# Altium PCB UP24CI01v5.PcbDoc
Units mm, origin at the board's own origin, x right, y up, seen from the top; angles counter-clockwise.
Board outline 40 x 29.97 mm, 2 copper layers (Top Layer, Bottom Layer), stack 1.569 mm thick; 37 components, 26 nets, 114 pads, 27 vias.
Unrouted connection lines stored in the file: 2.
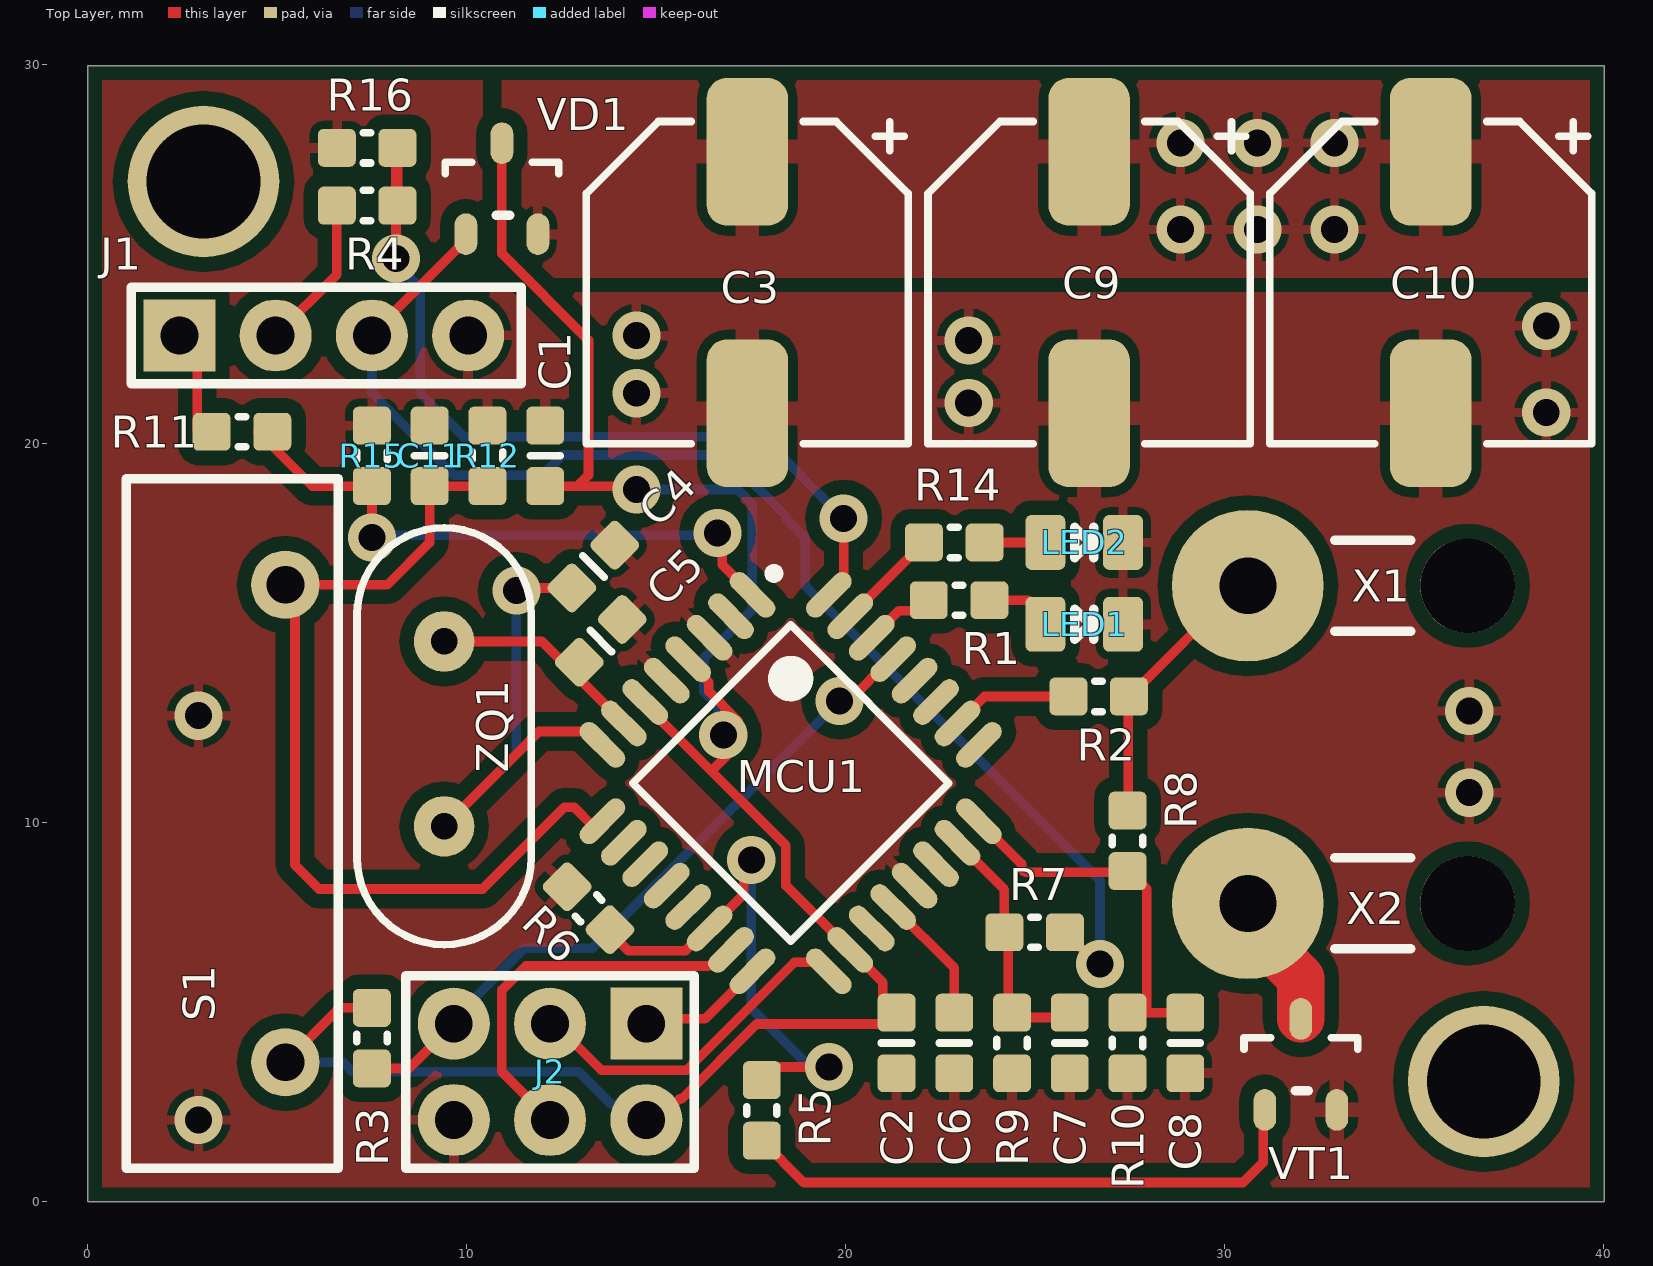
[diagram p0: Top Layer view]
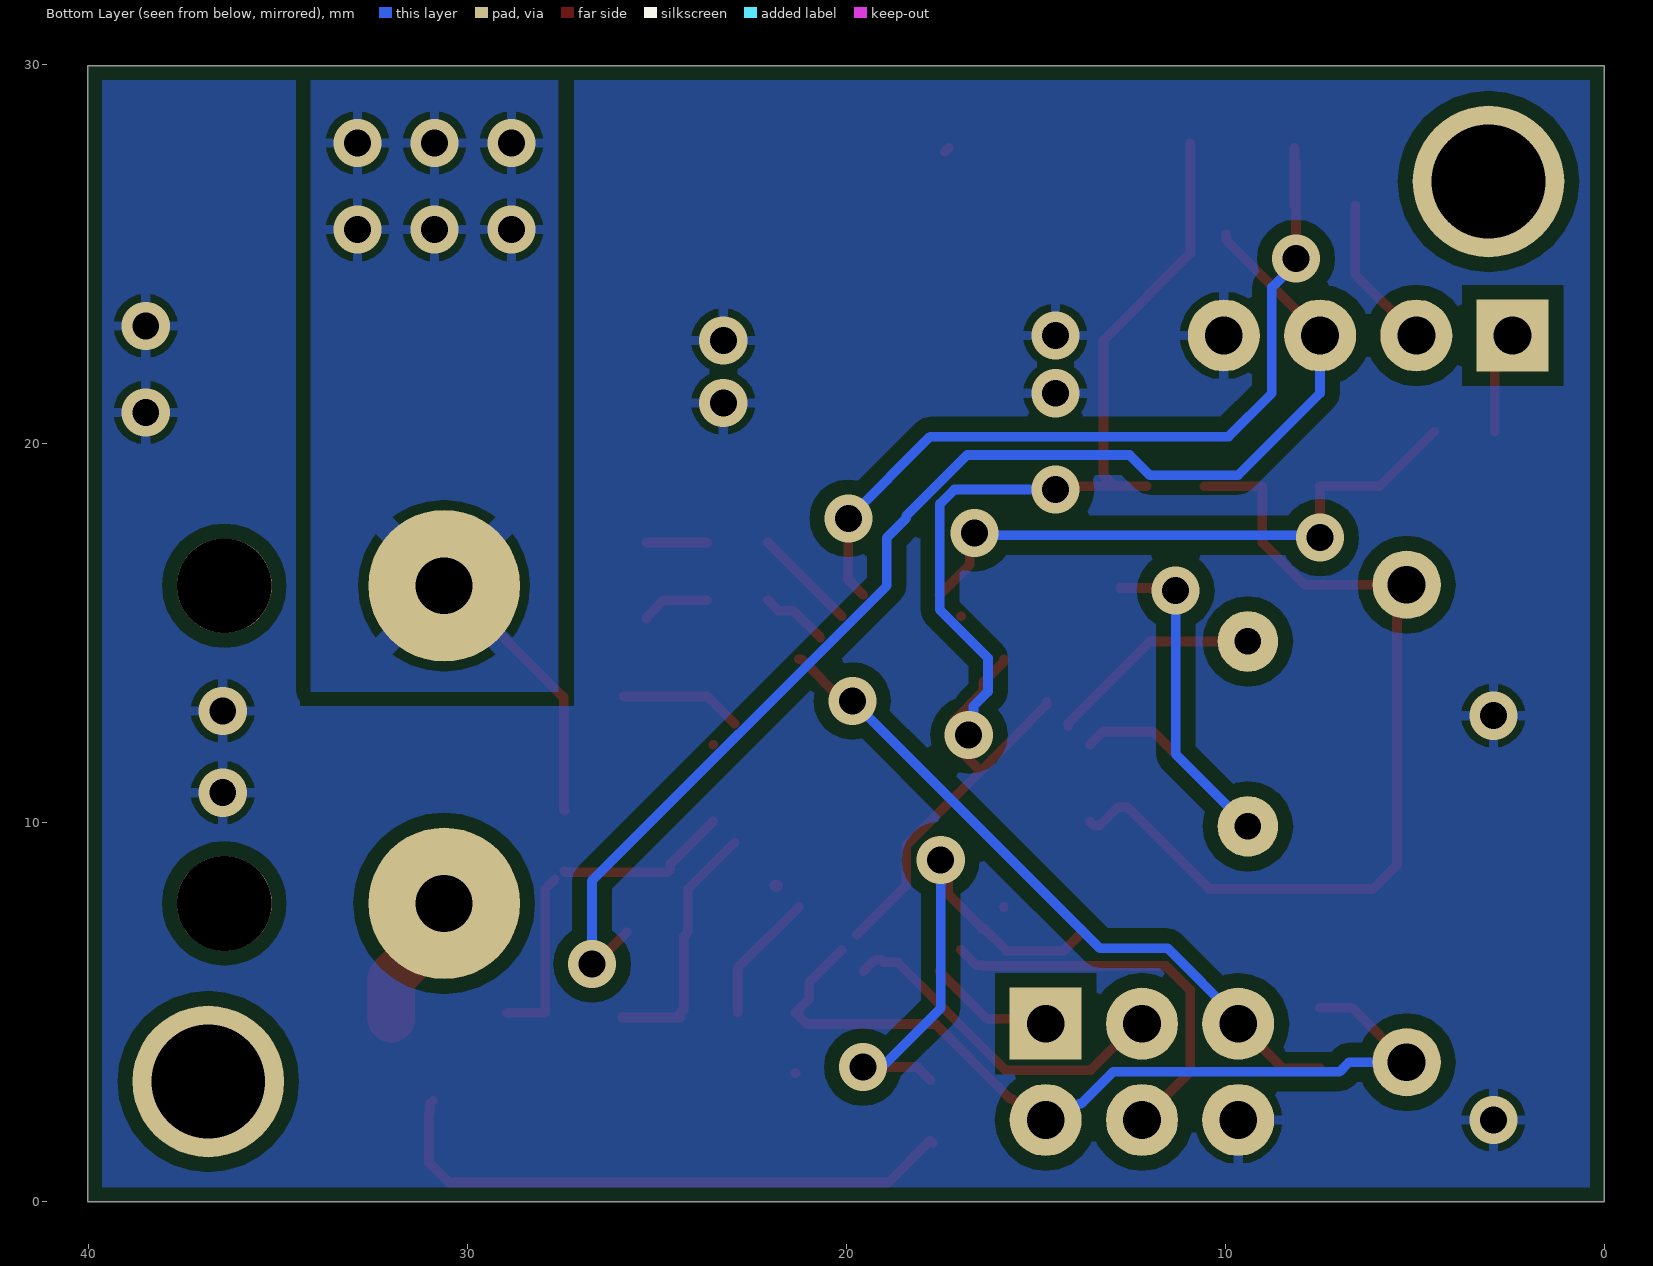
[diagram p1: Bottom Layer view, seen from below]
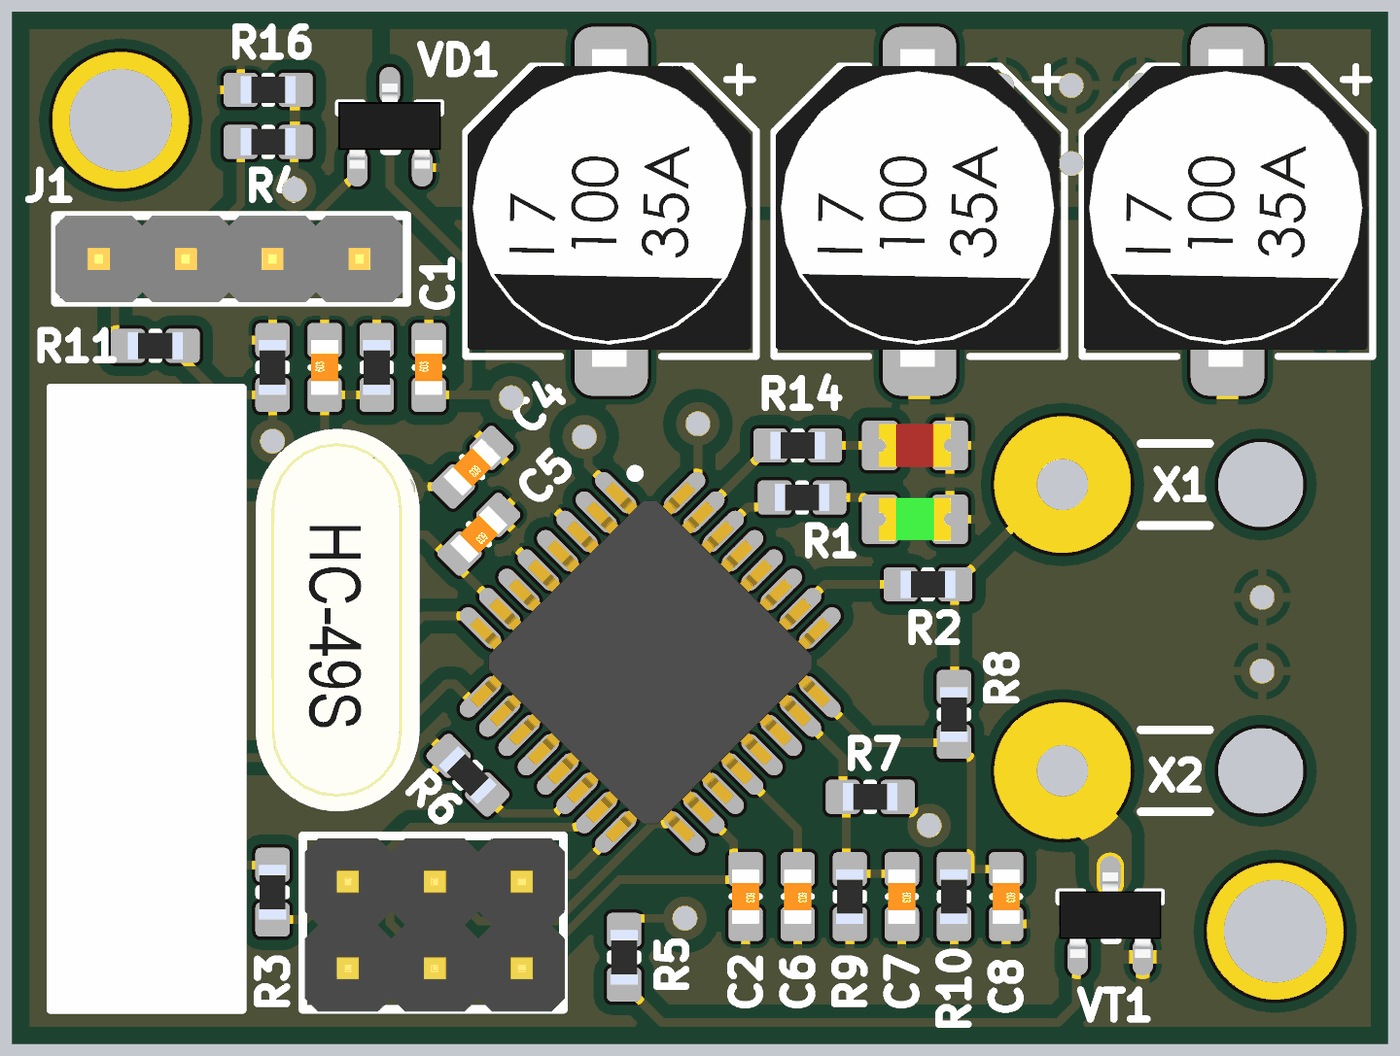
[diagram p2: 3D render of the assembled board from above, using the file's embedded part models]

## Layer stack, top to bottom
Top Solder: solder mask 0.0254, SM-001, Dk 4
Top Layer: signal copper 0.035
Dielectric 1: core 1.4986, Core-043, Dk 4.3
Bottom Layer: signal copper 0.035
Bottom Solder: solder mask 0.0254, SM-001, Dk 4

## Board outline
0,0 40.005,0 40.005,29.972 0,29.972

## Design rules (kind name [scope] priority, off if disabled: settings)
Clearance Clearance_Polygon [All vs InPolygon] p1: gap=0.381 ignorepadtopadclearanceinfootprint=FALSE
Clearance [All] p2: gap=0.15 ignorepadtopadclearanceinfootprint=FALSE
HoleSize [All] p1: absolutevalues=TRUE maxlimit=4 minlimit=0.025 maxpercent=80.000 minpercent=20.000
MinimumSolderMaskSliver [All] p1: minsoldermaskwidth=0.1
PlaneClearance [All] p1: clearance=0.762
PlaneConnect [All] p1: planeconnectstyle=Relief reliefexpansion=0.508 reliefentries=4 reliefconductorwidth=0.254 reliefairgap=0.381
PolygonConnect VT1 [InComponent('VT1')] p1: connectstyle=Relief reliefconductorwidth=0.4 reliefentries=4 polygonreliefangle="90 Angle" airgapwidth=0.254
PolygonConnect Power [InComponent('C3','C9','C10','X1')] p2: thpad.connectstyle=Relief thpad.reliefconductorwidth=0.635 thpad.reliefentries=4 thpad.polygonreliefangle="45 Angle" thpad.airgapwidth=0.254 smdpad.connectstyle=Relief smdpad.reliefconductorwidth=0.635 smdpad.reliefentries=4 smdpad.polygonreliefangle="90 Angle" smdpad.airgapwidth=0.254 via.connectstyle=Relief via.reliefconductorwidth=0.254 via.reliefentries=4 via.polygonreliefangle="90 Angle" via.airgapwidth=0.127
PolygonConnect [All] p3: connectstyle=Relief reliefconductorwidth=0.254 reliefentries=4 polygonreliefangle="90 Angle" airgapwidth=0.203
RoutingVias [All] p1: holewidth=0.711 width=1.27 viastyle="Through Hole" minholewidth=0.711 minwidth=1.27 maxholewidth=0.711 maxwidth=1.27
SilkToSilkClearance [All] p1: silktosilkclearance=0.1
SilkToSolderMaskClearance [IsPad] p1: minsilkscreentomaskgap=0.076 clearancetoexposedcopper=TRUE
SolderMaskExpansion mcu1 [InComponent('MCU1')] p1: expansion=0.152 istentingtop=FALSE
SolderMaskExpansion via [IsVia] p2: expansion=0.102 istentingtop=TRUE
SolderMaskExpansion [All] p3: expansion=0.102 istentingtop=FALSE
Width [All] p1: maxlimit=5 minlimit=0.15 preferedwidth=0.254
24 further rules are at their usual default settings.

## Components (designator, comment, footprint, x,y, rotation, side; value= is the part's Value field where it differs from the comment)
C1 "680нФ 10 В 10% 0603 X7R" C0603 12.065,19.685 r90 top value=680n
C2 "680нФ 10 В 10% 0603 X7R" C0603 21.336,4.191 r270 top value=680n
C3 "1000мкФ 6.3В 8x10.5" ELCAP_SMD_8x10.5 17.399,24.257 r270 top value=1000мкФ
C4 "22пФ  5%  50В 0603 NPO" C0603 13.335,16.764 r225 top value=22p
C5 "22пФ  5%  50В 0603 NPO" C0603 13.531,14.801 r225 top value=22p
C6 "10нФ 50 В 10% 0603 X7R" C0603 22.86,4.191 r270 top value=10n
C7 "10нФ 50 В 10% 0603 X7R" C0603 25.908,4.191 r270 top value=10n
C8 "10нФ 50 В 10% 0603 X7R" C0603 28.956,4.191 r270 top value=10n
C9 "1000мкФ 6.3В 8x10.5" ELCAP_SMD_8x10.5 26.416,24.257 r270 top value=1000мкФ
C10 "1000мкФ 6.3В 8x10.5" ELCAP_SMD_8x10.5 35.433,24.257 r270 top value=1000мкФ
C11 "47нФ 25 В 10% 0603 X7R" C0603 9.017,19.685 r90 top value=47n
J1 "PLS-4" "HEADER 1X4" 2.413,22.86 r0 top
J2 "PLD-6" "HEADER 2X3" 14.732,2.159 r180 top
LED1 "" LED0805G 26.289,15.24 r0 top
LED2 "" LED0805R 26.289,17.399 r0 top
MCU1 "ATmega88PA-AU" LQFP-32-P0.8 18.542,11.049 r315 top
R1 "1.0 кОм 0603 5%" R0603 22.987,15.875 r180 top value=1.0k
R2 "4.7 кОм 0603 5%" R0603 26.67,13.335 r0 top value=4.7k
R3 "4.7 кОм 0603 5%" R0603 7.493,4.318 r90 top value=4.7k
R4 "330 Ом 0603 5%" R0603 7.366,26.289 r180 top value=330
R5 "10 Ом 0603 5%" R0603 17.78,2.413 r90 top value=10
R6 "100 кОм 0603 5%" R0603 13.208,7.747 r135 top value=100k
R7 "1.0 кОм 0603 5%" R0603 24.981,7.112 r0 top value=1.0k
R8 "1.0 МОм 0603 5%" R0603 27.432,9.525 r90 top value=1.0Meg
R9 "100 Ом 0603 5%" R0603 24.384,4.191 r90 top value=100
R10 "100 кОм 0603 5%" R0603 27.432,4.191 r90 top value=100k
R11 "330 Ом 0603 5%" R0603 4.064,20.32 r180 top value=330
R12 "330 кОм 0603 5%" R0603 10.541,19.685 r270 top value=330k
R14 "1.0 кОм 0603 5%" R0603 22.86,17.399 r180 top value=1.0k
R15 "47 кОм 0603 5%" R0603 7.493,19.685 r270 top value=47k
R16 "47 кОм 0603 5%" R0603 7.366,27.813 r0 top value=47k
S1 "AETHDX-2802" AETHDX-2802 5.207,3.683 r0 top
VD1 "BAT54C" SOT-23 10.922,26.733 r90 top
VT1 "IRLML0030" SOT-23 32.004,3.626 r90 top
X1 "Wire_075" wire_075 30.607,16.256 r90 top
X2 "Wire_075" wire_075 30.607,7.874 r90 top
ZQ1 "12.0 MHz HC-49S" HC-49S 9.398,14.786 r270 top value="12.0 MHz"

## Footprints (in the part's own frame and the unit in brackets; to place one, negate y for a bottom-side part, rotate by r counter-clockwise, add the part's x,y. Pads: shape width x height; smd on the part's side, far side on the other; paste and mask are expansions set on the pad)
AETHDX-2802 [mm]
  round 1.8 hole 1: 0(0,12.6) 1(0,0)
  silkscreen extent -4.2,-2.8 1.4,15.4, body extent -4.2,-2.82 1.4,15.38, height 6.23
C0603 [mm]
  rrect30% 1x1 smd: 1(-0.8,0) 2(0.8,0)
  silkscreen extent 0,-0.4 0,0.4, body extent -0.8,-0.4 0.8,0.4, height 0.3
ELCAP_SMD_8x10.5 [mm]
  rrect50% 3.9x2.15 smd: 1(-3.45,0) 2(3.45,0)
  silkscreen extent -4.25,-4.25 4.25,4.25, body extent -4.75,-4.2 4.55,4.1, height 10.61
HC-49S [mm]
  round 1.6 hole 0.7: 1(0,0) 2(4.88,0)
  silkscreen extent -3,-2.3 8,2.3, body extent -3.09,-2.35 8.09,2.3, height 3.71
"HEADER 1X4" [mm]
  rect 1.9x1.9 hole 1: 1(0,0)
  round 1.9 hole 1: 2(2.54,0) 3(5.08,0) 4(7.62,0)
  silkscreen extent -1.27,-1.27 9.02,1.27, body extent -1.27,-1.27 8.89,1.27, height 8.6
"HEADER 2X3" [mm]
  rect 1.9x1.9 hole 1: 1(0,-2.54)
  round 1.9 hole 1: 2(0,0) 3(2.54,-2.54) 4(2.54,0) 5(5.08,-2.54) 6(5.08,0)
  silkscreen extent -1.27,-3.81 6.35,1.27, body extent -1.32,-3.74 6.3,1.34, height 8.64
LED0805G [mm]
  rrect30% 1.05x1.45 smd: A(-1.025,0) K(1.025,0)
  silkscreen extent -0.25,-0.4 0.25,0.4, body extent -1.05,-0.62 1.05,0.63, height 0.75
LED0805R [mm]
  rrect30% 1.05x1.45 smd: A(-1.025,0) K(1.025,0)
  silkscreen extent -0.25,-0.4 0.25,0.4, body extent -1.05,-0.63 1.05,0.63, height 0.75
LQFP-32-P0.8 [mm]
  oval 1.5x0.5 smd: 1(-4.225,2.8) 2(-4.225,2) 3(-4.225,1.2) 4(-4.225,0.4) 5(-4.225,-0.4) 6(-4.225,-1.2) 7(-4.225,-2) 8(-4.225,-2.8) 17(4.225,-2.8) 18(4.225,-2) 19(4.225,-1.2) 20(4.225,-0.4) 21(4.225,0.4) 22(4.225,1.2) 23(4.225,2) 24(4.225,2.8)
  oval 0.5x1.5 smd: 9(-2.8,-4.225) 10(-2,-4.225) 11(-1.2,-4.225) 12(-0.4,-4.225) 13(0.4,-4.225) 14(1.2,-4.225) 15(2,-4.225) 16(2.8,-4.225) 25(2.8,4.225) 26(2,4.225) 27(1.2,4.225) 28(0.4,4.225) 29(-0.4,4.225) 30(-1.2,4.225) 31(-2,4.225) 32(-2.8,4.225)
  silkscreen extent -4.35,-2.95 2.95,3.72, body extent -4.5,-4.5 4.5,4.5, height 1.6
R0603 [mm]
  rrect30% 1x1 smd: 1(-0.8,0) 2(0.8,0)
  silkscreen extent -0.1,-0.4 0.1,0.4, body extent -0.8,-0.4 0.8,0.4, height 0.5
SOT-23 [mm]
  oval 1.1x0.6 smd: 1(-1.2,0.95) 2(-1.2,-0.95) 3(1.2,0)
  silkscreen extent -0.7,-1.5 0.7,1.5, body extent -1.23,-1.5 1.27,1.5, height 1.1
wire_075 [mm]
  round 4 hole 1.5: 1(0,0)
  round 2.5 hole 2.5 unplated: 2(0,-5.8)
  silkscreen extent -1.2,-4.3 1.2,-2.3, body extent -1.15,-6.95 1.15,1.15, height 7.15

## Part data
C1: library part "47нФ 25 В", "конденсатор керамический SMD", Part Number="680нФ 10В", showvalue=680n, VOLTAGE=10V, Component Type=Standard, HelpURL=d:\doc\datasheets\-COMPONENTS\Capacitors\YAGEO\Yageo_CC_cercaps.pdf, Pin Count=2
C2: library part "47нФ 25 В", "конденсатор керамический SMD", Part Number="680нФ 10 В", showvalue=680n, VOLTAGE=10V, Component Type=Standard, HelpURL=d:\doc\datasheets\-COMPONENTS\Capacitors\YAGEO\Yageo_CC_cercaps.pdf, Pin Count=2
C3 C9 C10: "конденсатор электролитический SMD", VOLTAGE=6.3В, Component Type=Standard, Part Number="1000мкФ 6.3В 8x10.5", Pin Count=2
C4 C5: library part "22пФ  50В", "конденсатор керамический", showvalue=22пФ, VOLTAGE="50 В", articul=932, Component Type=Standard, HelpURL=d:\doc\datasheets\-COMPONENTS\Capacitors\AVX\NPO.pdf, Part Number="22пФ  50В", Pin Count=2
C6 C7 C8: library part "10нФ 50 В", "конденсатор керамический SMD", showvalue=10нФ, VOLTAGE="50 В", articul=946, Component Type=Standard, HelpURL=d:\doc\datasheets\-COMPONENTS\Capacitors\YAGEO\Yageo_CC_cercaps.pdf, Part Number="10нФ 50 В", Pin Count=2
C11: library part "47нФ 25 В", "конденсатор керамический SMD", showvalue=47нФ, VOLTAGE="25 В", Component Type=Standard, HelpURL=d:\doc\datasheets\-COMPONENTS\Capacitors\YAGEO\Yageo_CC_cercaps.pdf, Part Number="47нФ 25 В", Pin Count=2
J1: "Штырьки на плату шаг 2,54 мм", articul=225, NAME=PLS-4, slice=0.1
LED1: library part GB-SM0805UPGW-TR, "зеленый светодиод", articul=829, Vf=3.3V
LED2: library part GB-SM0805USW-TR, "красный светодиод", Vf=1.9V
MCU1: library part ATmega8A-AU, "8-bit AVR Microcontroller, 8KB Flash, 512 Bytes EEPROM, 1KB SRAM, 32-pin TQFP, Industrial Grade (-40°C to 85°C)", HeplURL=d:\doc\datasheets\A\AT\ATmega\atmega8a.pdf, NAME=ATmega88PA-AU
R1 R7 R14: "резистор постоянный", showvalue="1.0 кОм", articul=720, Component Type=Standard, HelpURL="d:\doc\datasheets\-COMPONENTS\Resistors\Royal Ohm\general.pdf", Part Number="1.0 кОм 0603 5%", Pin Count=2
R2 R3: "резистор постоянный", showvalue="4.7 кОм", articul=1195, Component Type=Standard, HelpURL="d:\doc\datasheets\-COMPONENTS\Resistors\Royal Ohm\general.pdf", Part Number="4.7 кОм 0603 5%", Pin Count=2
R4 R11: "резистор постоянный", showvalue="330 Ом", articul=2049, Component Type=Standard, HelpURL="d:\doc\datasheets\-COMPONENTS\Resistors\Royal Ohm\general.pdf", Part Number="330 Ом 0603 5%", Pin Count=2
R5: "резистор постоянный", showvalue="10 Ом", articul=0, Component Type=Standard, HelpURL="d:\doc\datasheets\-COMPONENTS\Resistors\Royal Ohm\general.pdf", Part Number="10 Ом 0603 5%", Pin Count=2
R6 R10: "резистор постоянный", showvalue="100 кОм", articul=919, Component Type=Standard, HelpURL="d:\doc\datasheets\-COMPONENTS\Resistors\Royal Ohm\general.pdf", Part Number="100 кОм 0603 5%", Pin Count=2
R8: "резистор постоянный", showvalue="1.0 МОм", articul=2052, Component Type=Standard, HelpURL="d:\doc\datasheets\-COMPONENTS\Resistors\Royal Ohm\general.pdf", Part Number="1.0 МОм 0603 5%", Pin Count=2
R9: "резистор постоянный", showvalue="100 Ом", articul=2671, Component Type=Standard, HelpURL="d:\doc\datasheets\-COMPONENTS\Resistors\Royal Ohm\general.pdf", Part Number="100 Ом 0603 5%", Pin Count=2
R12: "резистор постоянный", showvalue="330 кОм", articul=0, Component Type=Standard, HelpURL="d:\doc\datasheets\-COMPONENTS\Resistors\Royal Ohm\general.pdf", Part Number="330 кОм 0603 5%", Pin Count=2
R15 R16: "резистор постоянный", showvalue="47 кОм", articul=920, Component Type=Standard, HelpURL="d:\doc\datasheets\-COMPONENTS\Resistors\Royal Ohm\general.pdf", Part Number="47 кОм 0603 5%", Pin Count=2
S1: "Shock sensor AETHDX-2802"
VD1: "два диода Шоттки", articul=524, HelpURL=d:\doc\datasheets\B\BA\BAT54_SER.pdf, NAME=BAT54C
VT1: library part IRLML2060TRPBF, "N-channel MOSFET", articul=619, NAME=IRLML0030
X1 X2: "Посадочное место под 0,75 кабель"
ZQ1: "Кварцевый резонатор", HelpURL=d:\doc\datasheets\-COMPONENTS\Crystal\GEYER-KX-49-V1_01.pdf, NAME="12.0 MHz HC-49S"
J2: articul=226, slice=0.075

## Free pads (board coordinates)
  round 4 hole 3: 2(3.048,26.924) 2(36.83,3.175)

## Via types
v1: diameter 1.27, hole 0.711, Top Layer to Bottom Layer, tented both sides, 27 vias

## Nets (pads, with @x,y where several pads share a name; then routed paths per layer and width w, separated by ;. In a path a pad name is that pad's centre, name@x,y a point inside that pad or via, vN(x,y) a via of type N, cw(c..) or ccw(c..) an arc to the next point about the centre after c; other vN are vias at no path point)
GND: C1.2 C2.2 C3.2 C4.1 C5.1 C6.2 C7.2 C8.2 C9.2 C10.2 C11.2 J1.4 J2.6 LED1.K LED2.K MCU1.3 MCU1.5 MCU1.21 R6.2 R9.1 R10.1 R12.1 R15.1 R16.1 VT1.2 | length 0.1
  Top Layer w0.305: MCU1.21 MCU1.21@21.865,8.344
  other v1: 2.921,2.159 36.449,10.795 2.921,12.827 36.449,12.954 38.481,20.828 23.241,21.082 14.478,21.336 23.241,22.733 14.478,22.86 38.481,23.114
NetC1_1: C1.1 C2.1 J2.2 MCU1.4 MCU1.6 MCU1.18 R3.2 S1.1 VD1.3 | length 56.1
  Top Layer w0.254: S1.1 6.642,5.118 R3.2 ; VD1.3 10.922,25.019 13.208,22.733 13.208,19.177 12.916,18.885 ; C1.1 12.916,18.885 ; v1(14.478,18.796) 14.389,18.885 12.916,18.885 ; MCU1.6 14.706,13.121 15.182,12.645 15.182,12.634 15.888,11.928 18.415,9.401 18.415,8.348 MCU1.18@19.715,7.048 ; J2.2@14.732,2.286 15.177,2.286 15.611,2.719 15.673,2.719 17.645,4.691 21.036,4.691 C2.1 20.977,5.35 20.977,5.785 MCU1.18 ; MCU1.4 15.837,14.253 16.383,13.707 16.383,13.462 v1@17.145,12.7 ; 16.487,11.407 v1@17.081,12.001
  Bottom Layer w0.254: S1.1 6.731,3.683 6.985,3.429 12.954,3.429 13.791,2.592 13.853,2.592 14.097,2.349 J2.2@14.097,2.286 ; v1(14.478,18.796) 17.145,18.796 17.526,18.415 17.526,15.621 16.256,14.351 16.256,13.462 16.637,13.081 16.637,12.446 v1(16.764,12.319)
NetC3_1: C3.1 C9.1 C10.1 R2.2 R8.2 VD1.2 X1.1 | length 8.4
  Top Layer w0.254: C3.1@17.293,27.813 C3.1 ; R8.2 27.451,10.344 27.451,13.316 R2.2 27.482,13.335 30.403,16.256 X1.1 X1.1@30.607,15.353
  other v1: 28.829,25.654 30.861,25.654 32.893,25.654 28.829,27.94 30.861,27.94 32.893,27.94
NetC4_2: C4.2 MCU1.8 ZQ1.2 | length 13.8
  Top Layer w0.254: ZQ1.2 11.902,12.41 13.221,12.41 MCU1.8 ; v1(11.303,16.129) 11.388,16.044 11.599,16.044 11.753,16.198 C4.2
  Bottom Layer w0.254: ZQ1.2 11.303,11.811 v1@11.303,16.002
NetC5_2: C5.2 MCU1.7 ZQ1.1 | length 5.8
  Top Layer w0.254: ZQ1.1 11.977,14.786 12.746,14.016 MCU1.7 MCU1.7@14.14,12.556
  Bottom Layer w0.254: ZQ1.1@9.343,14.841 ZQ1.1
NetC6_1: C6.1 MCU1.20 | length 3.5
  Top Layer w0.254: MCU1.20 22.86,6.165 C6.1
NetC7_1: C7.1 MCU1.23 R7.1 R9.2 | length 6.7
  Top Layer w0.254: MCU1.23 24.181,8.238 R7.1 24.282,7.011 24.282,5.092 R9.2 24.384,4.864 C7.1@25.908,4.864
NetC8_1: C8.1 MCU1.24 R8.1 R10.2 | length 9.2
  Top Layer w0.254: MCU1.24 24.638,8.913 24.638,8.785 24.729,8.694 27.401,8.694 R8.1 ; R8.1@27.686,8.509 27.94,8.255 27.94,4.991 C8.1
NetC11_1: C11.1 MCU1.9 R12.2 S1.0 | length 24.6
  Top Layer w0.254: R12.2 C11.1 9.017,17.399 7.901,16.283 S1.0 5.461,16.029 5.461,8.89 6.096,8.255 10.414,8.255 12.573,10.414 12.827,10.414 13.307,9.934 13.467,9.934 MCU1.9
  Bottom Layer w0.254: S1.0@5.016,16.093 S1.0
NetJ1_1: J1.1 R11.2 | length 3.6
  Top Layer w0.254: J1.1@1.867,22.314 J1.1 2.883,22.39 R11.2@2.883,20.32 ; J1.1@2.883,22.441 J1.1@2.921,22.479
NetJ1_2: J1.2 R4.2 | length 4.1
  Top Layer w0.254: J1.2 6.566,24.473 R4.2
NetJ1_3: J1.3 R7.2 VD1.1 | length 34.5
  Top Layer w0.254: J1.3@7.808,22.672 7.808,23.213 9.812,25.217 9.972,25.377 VD1.1 ; R7.2 25.793,7.112 26.629,6.276 v1(26.704,6.276)
  Bottom Layer w0.254: J1.3 7.493,21.336 9.652,19.177 11.988,19.177 12.519,19.708 16.804,19.708 18.415,18.097 18.415,18.034 18.923,17.526 18.923,16.256 26.704,8.475 v1(26.704,6.276)
NetJ2_1: J2.1 MCU1.16 | length 3.3
  Top Layer w0.254: J2.1@14.732,4.826 16.279,4.826 MCU1.16
NetJ2_3: J2.3 MCU1.17 | length 9.3
  Top Layer w0.254: J2.3@12.192,4.826 13.546,3.472 15.797,3.472 15.959,3.634 15.959,3.64 18.641,6.322 19.016,6.322 19.082,6.388 19.243,6.388 MCU1.17
NetJ2_4: J2.4 MCU1.15 | length 9.8
  Top Layer w0.254: J2.4@11.733,2.618 10.922,3.429 10.922,5.588 11.557,6.223 16.37,6.223 16.394,6.247 16.568,6.247 MCU1.15
NetJ2_5: J2.5 MCU1.29 R3.1 | length 18.2
  Top Layer w0.254: R3.1 8.471,3.518 J2.5 ; v1(19.835,13.219) 20.08,13.219 21.18,14.319 MCU1.29
  Bottom Layer w0.254: J2.5@9.652,4.826 11.52,6.694 13.31,6.694 v1(19.835,13.219)
NetLED1_A: LED1.A R1.1 | length 1.8
  Top Layer w0.254: R1.1@23.66,15.875 24.812,15.875 25.264,15.423 LED1.A@25.264,15.382
NetLED2_A: LED2.A R14.1 | length 1.6
  Top Layer w0.254: R14.1 LED2.A
NetMCU1_1: MCU1.1 R11.1 R15.2 | length 16.2
  Top Layer w0.254: R11.1@4.483,20.32 5.918,18.885 R15.2 v1(7.493,17.526) ; v1(16.614,17.653) 16.735,17.532 16.735,16.816 MCU1.1
  Bottom Layer w0.254: v1(7.493,17.526) 7.556,17.59 16.551,17.59 v1(16.614,17.653)
NetMCU1_14: MCU1.14 R5.2 R6.1 | length 13.9
  Top Layer w0.254: R6.1 13.774,7.108 14.255,6.627 15.771,6.627 16.357,7.213 MCU1.14 17.309,8.119 17.309,8.823 v1(17.503,9.017) ; R5.2 18.123,3.556 v1(19.558,3.556)
  Bottom Layer w0.254: v1(17.503,9.017) 17.503,5.103 19.05,3.556 v1(19.558,3.556)
NetMCU1_26: MCU1.26 R2.1 | length 3.2
  Top Layer w0.254: MCU1.26 23.656,13.335 R2.1
NetMCU1_30: MCU1.30 R1.2 | length 1.8
  Top Layer w0.254: MCU1.30 21.395,15.599 21.784,15.599 R1.2@22.06,15.875
NetMCU1_31: MCU1.31 R14.2 | length 2.8
  Top Layer w0.254: MCU1.31 20.115,15.453 22.06,17.397 R14.2
NetMCU1_32: MCU1.32 R4.1 R16.2 | length 22.6
  Top Layer w0.254: v1(8.128,24.892) R16.2@8.128,27.432 ; R4.1 R16.2 ; MCU1.32 19.939,16.406 v1(19.939,18.034)
  Bottom Layer w0.254: v1(8.128,24.892) 8.128,24.765 8.763,24.13 8.763,21.336 9.906,20.193 17.78,20.193 v1(19.939,18.034)
NetR5_1: R5.1 VT1.1 | length 15.7
  Top Layer w0.254: R5.1@17.716,1.549 R5.1 18.885,0.508 30.48,0.508 31.01,1.038 31.01,2.338 30.988,2.36 30.988,2.575 VT1.1@30.894,2.669
NetVT1_3: VT1.3 X2.1 | length 3.6
  Top Layer w0.254: X2.1@30.607,7.301 X2.1
  Top Layer w1.254: X2.1@30.607,7.301 32.004,5.904 VT1.3
pads on no net: MCU1.2 MCU1.10 MCU1.11 MCU1.12 MCU1.13 MCU1.19 MCU1.22 MCU1.25 MCU1.27 MCU1.28 X1.2 X2.2
copper on no net: | length 0

## Polygon pours and split planes (outlines as drawn)
GND on Bottom Layer "GND_L02_P009" (solid, pour order 9): 27.178,29.591 27.178,13.081 34.417,13.081 34.417,29.591 39.624,29.591 39.624,0.381 0.381,0.381 0.381,29.591
NetC3_1 on Bottom Layer "NETC3_1_L02_P002" (solid, pour order 2): 27.596,13.462 34.129,13.462 34.129,29.591 27.596,29.591
GND on Top Layer "GND_L01_P008" (solid, pour order 8): 10.414,29.591 10.414,24.003 39.624,24.003 39.624,0.381 0.381,0.381 0.381,29.591
NetC3_1 on Top Layer "NETC3_1_L01_P001" (solid, pour order 1): 10.922,24.384 39.624,24.384 39.624,29.591 10.922,29.591

## Silkscreen, mask and mechanical layers (free items; w line width, h text height)
Board:
  the board outline again, w0.254